# Altium PCB MCU_PCB.PcbDoc.pcbdoc
Units mil, origin at the board's own origin, x right, y up, seen from the top; angles counter-clockwise.
Board outline 2915.03 x 2275.03 mil, 4 copper layers (Top Layer 1, Middle Layer, Bottom Layer, Ground Layer), stack 23.756 mil thick; 52 components, 43 nets, 200 pads, 54 vias.
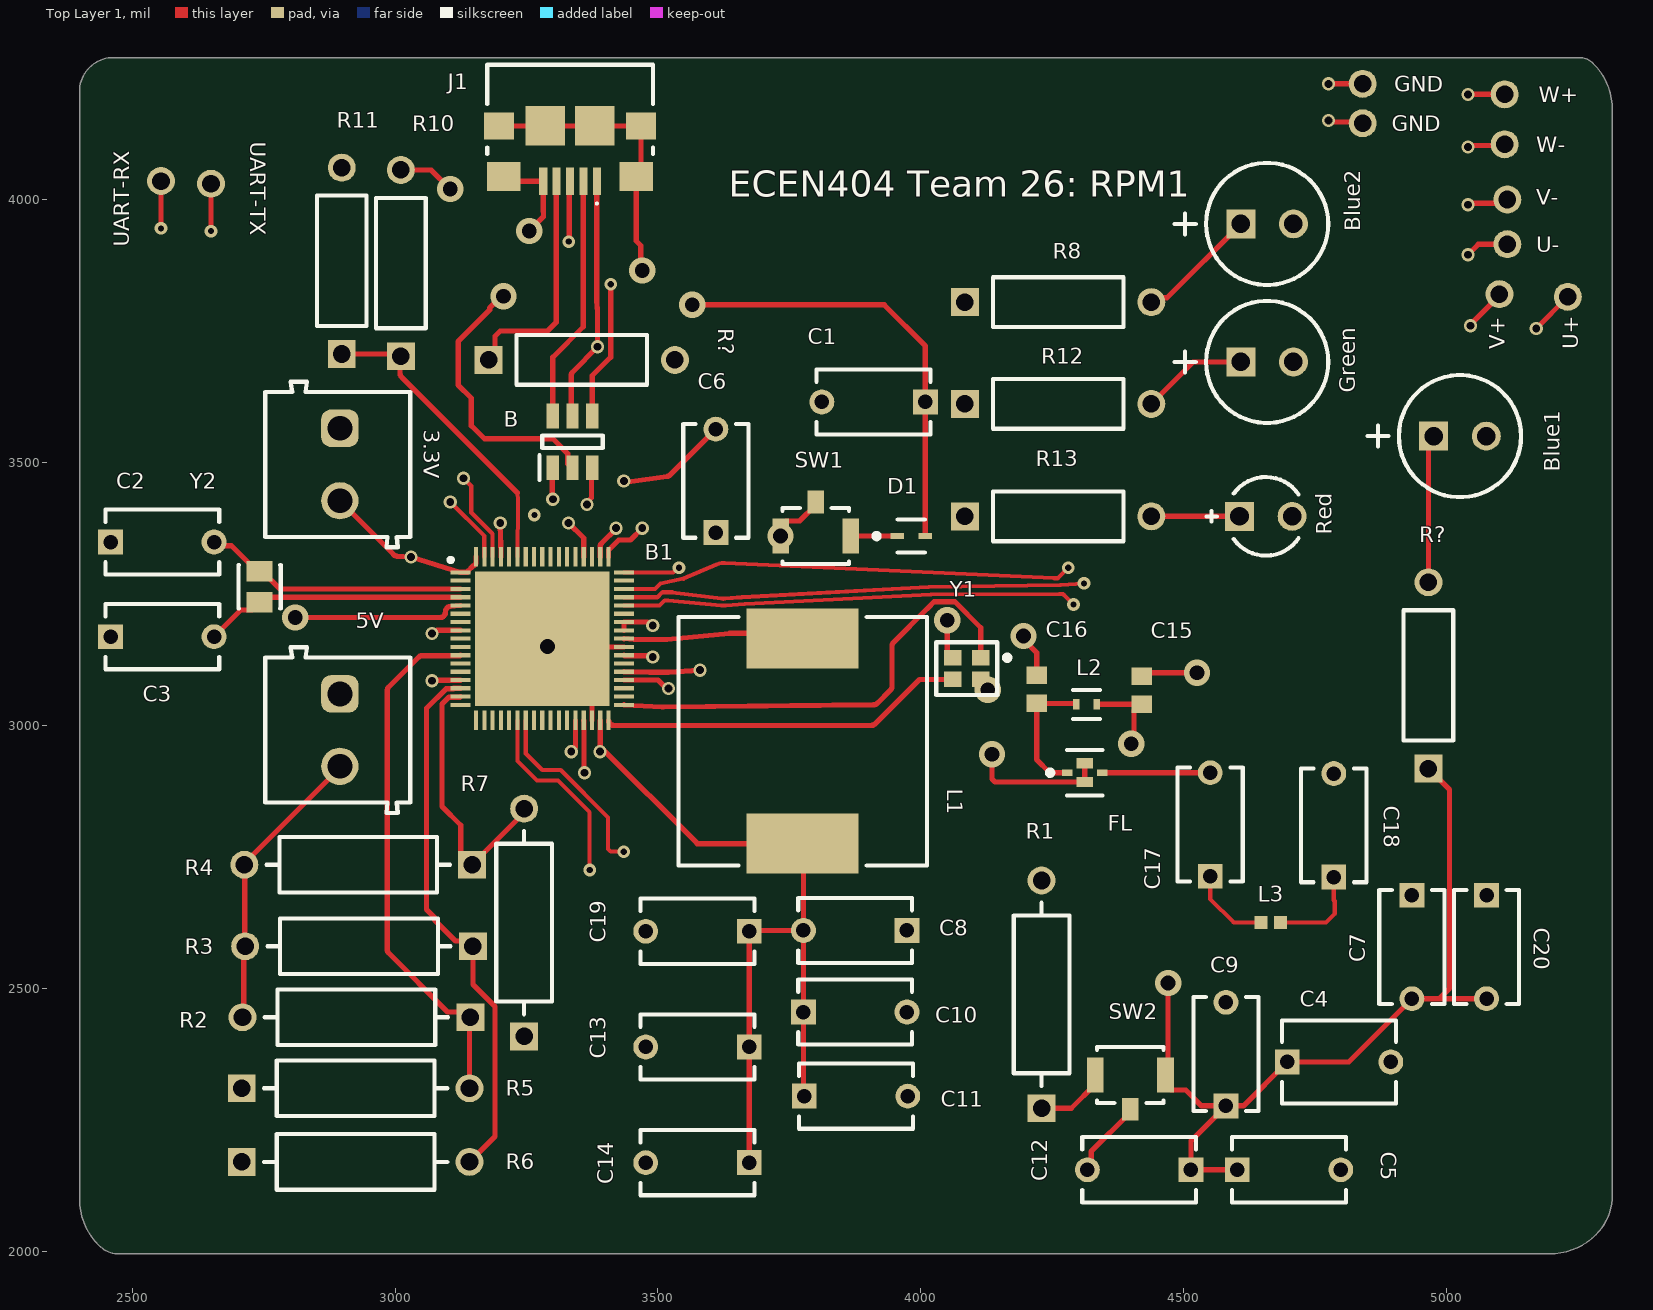
[diagram p0: Top Layer 1 view]
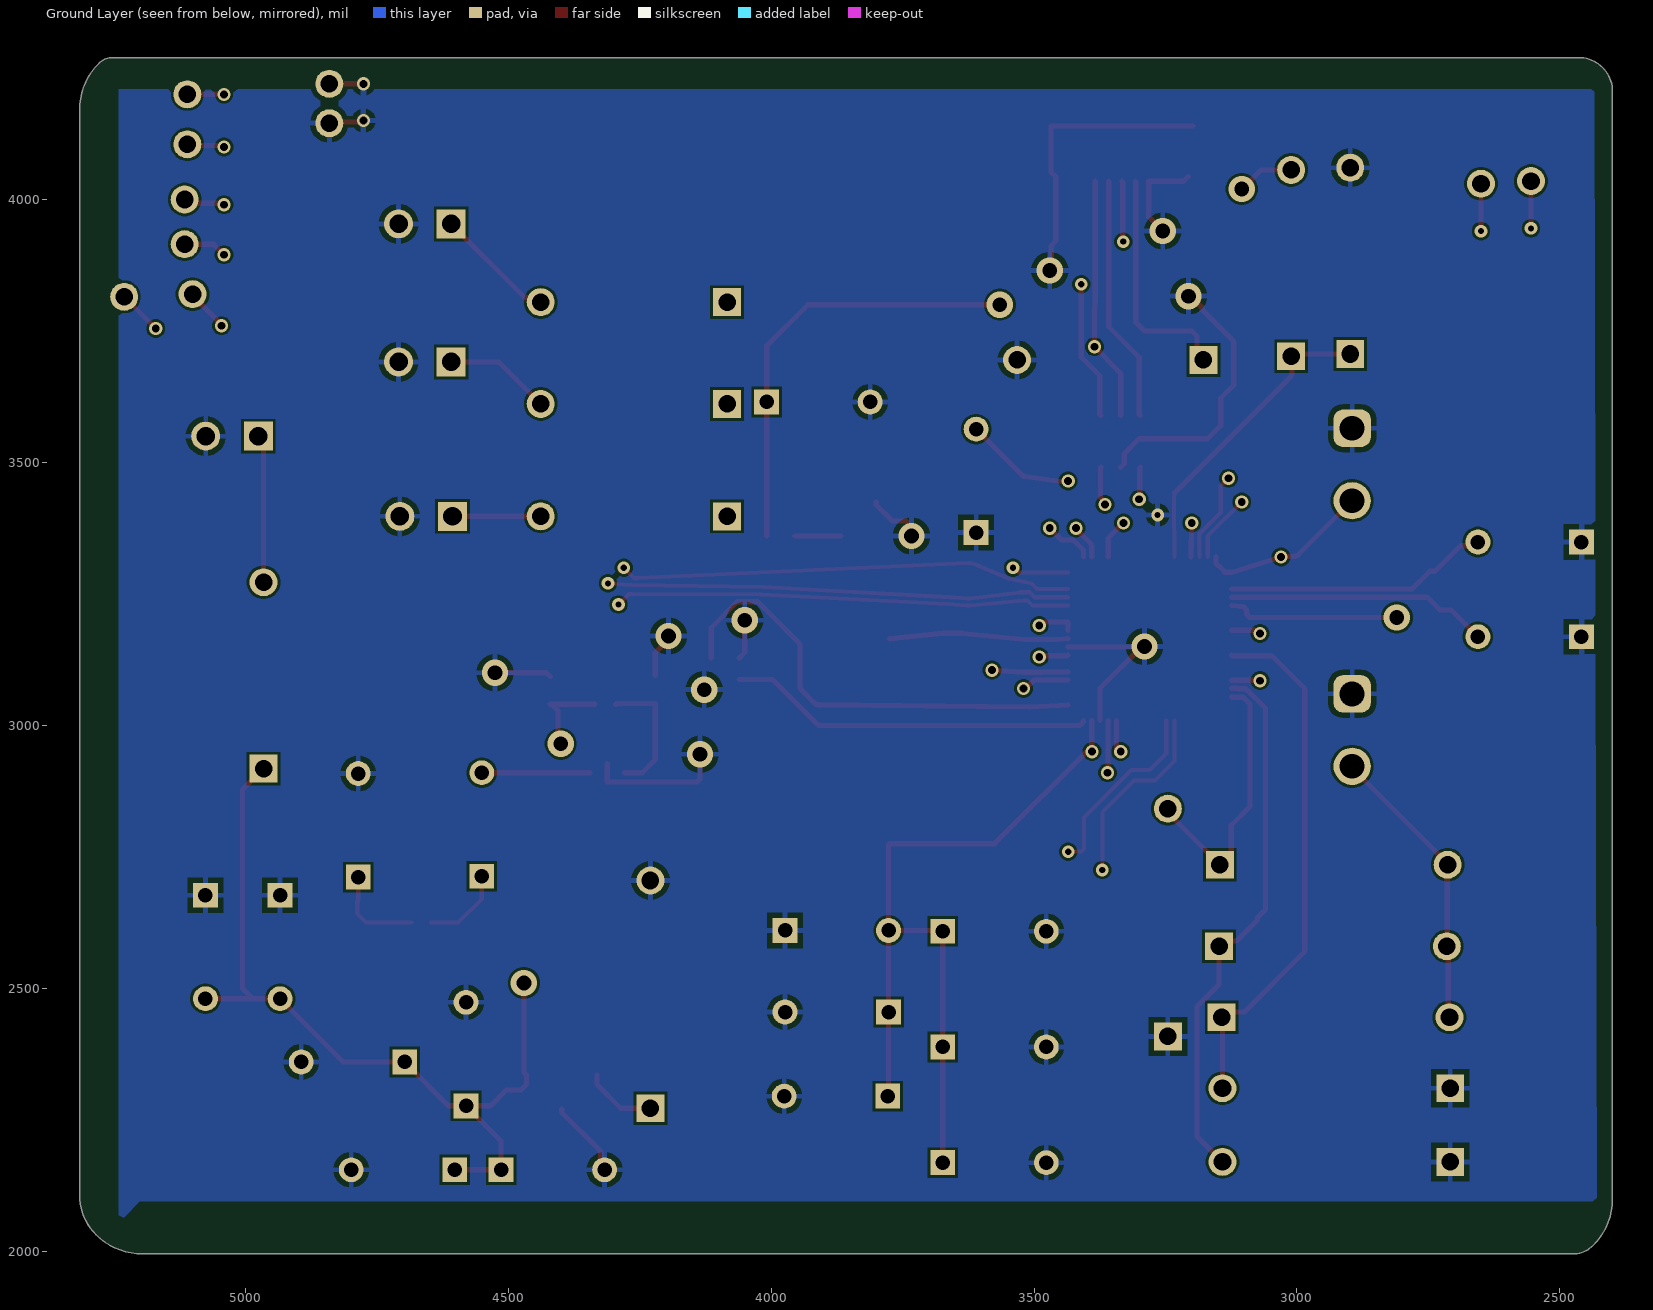
[diagram p1: Ground Layer view, seen from below]
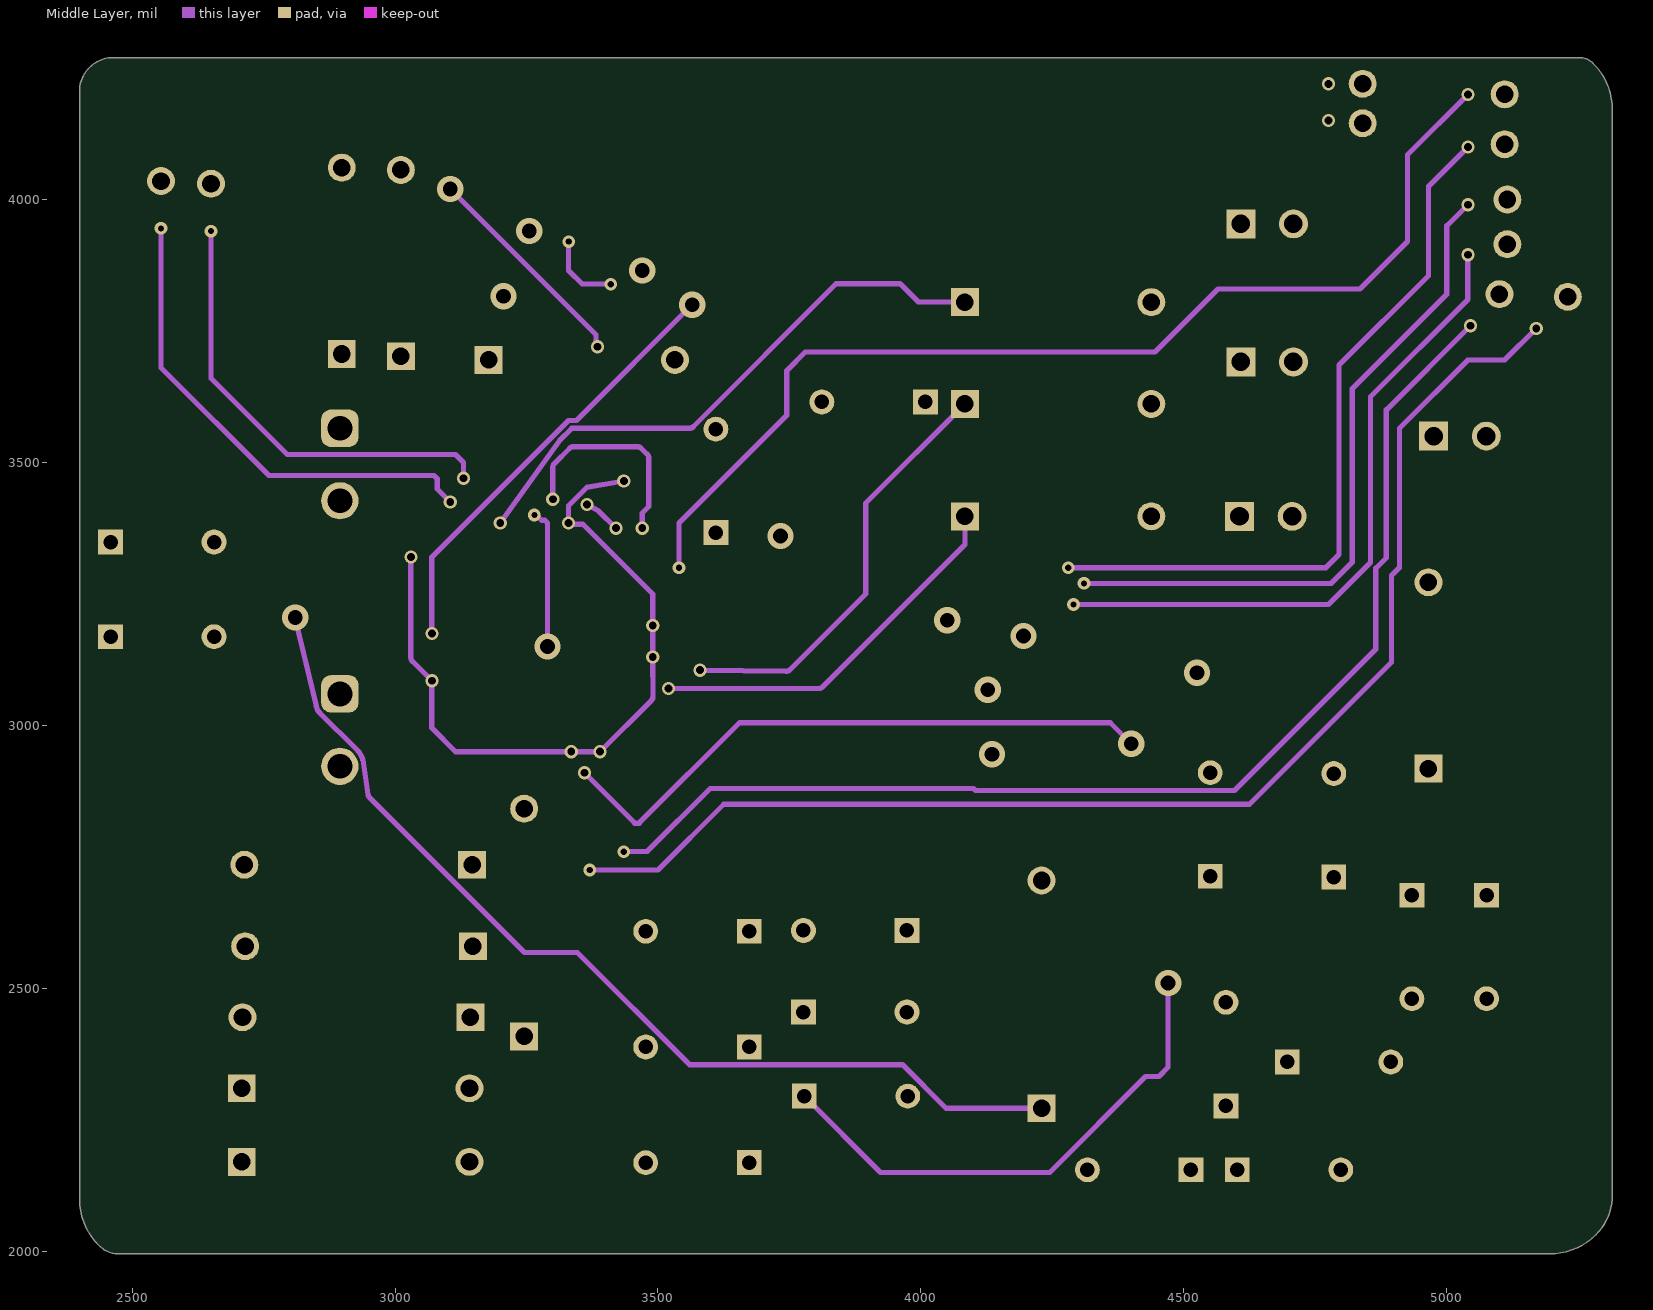
[diagram p2: Middle Layer]
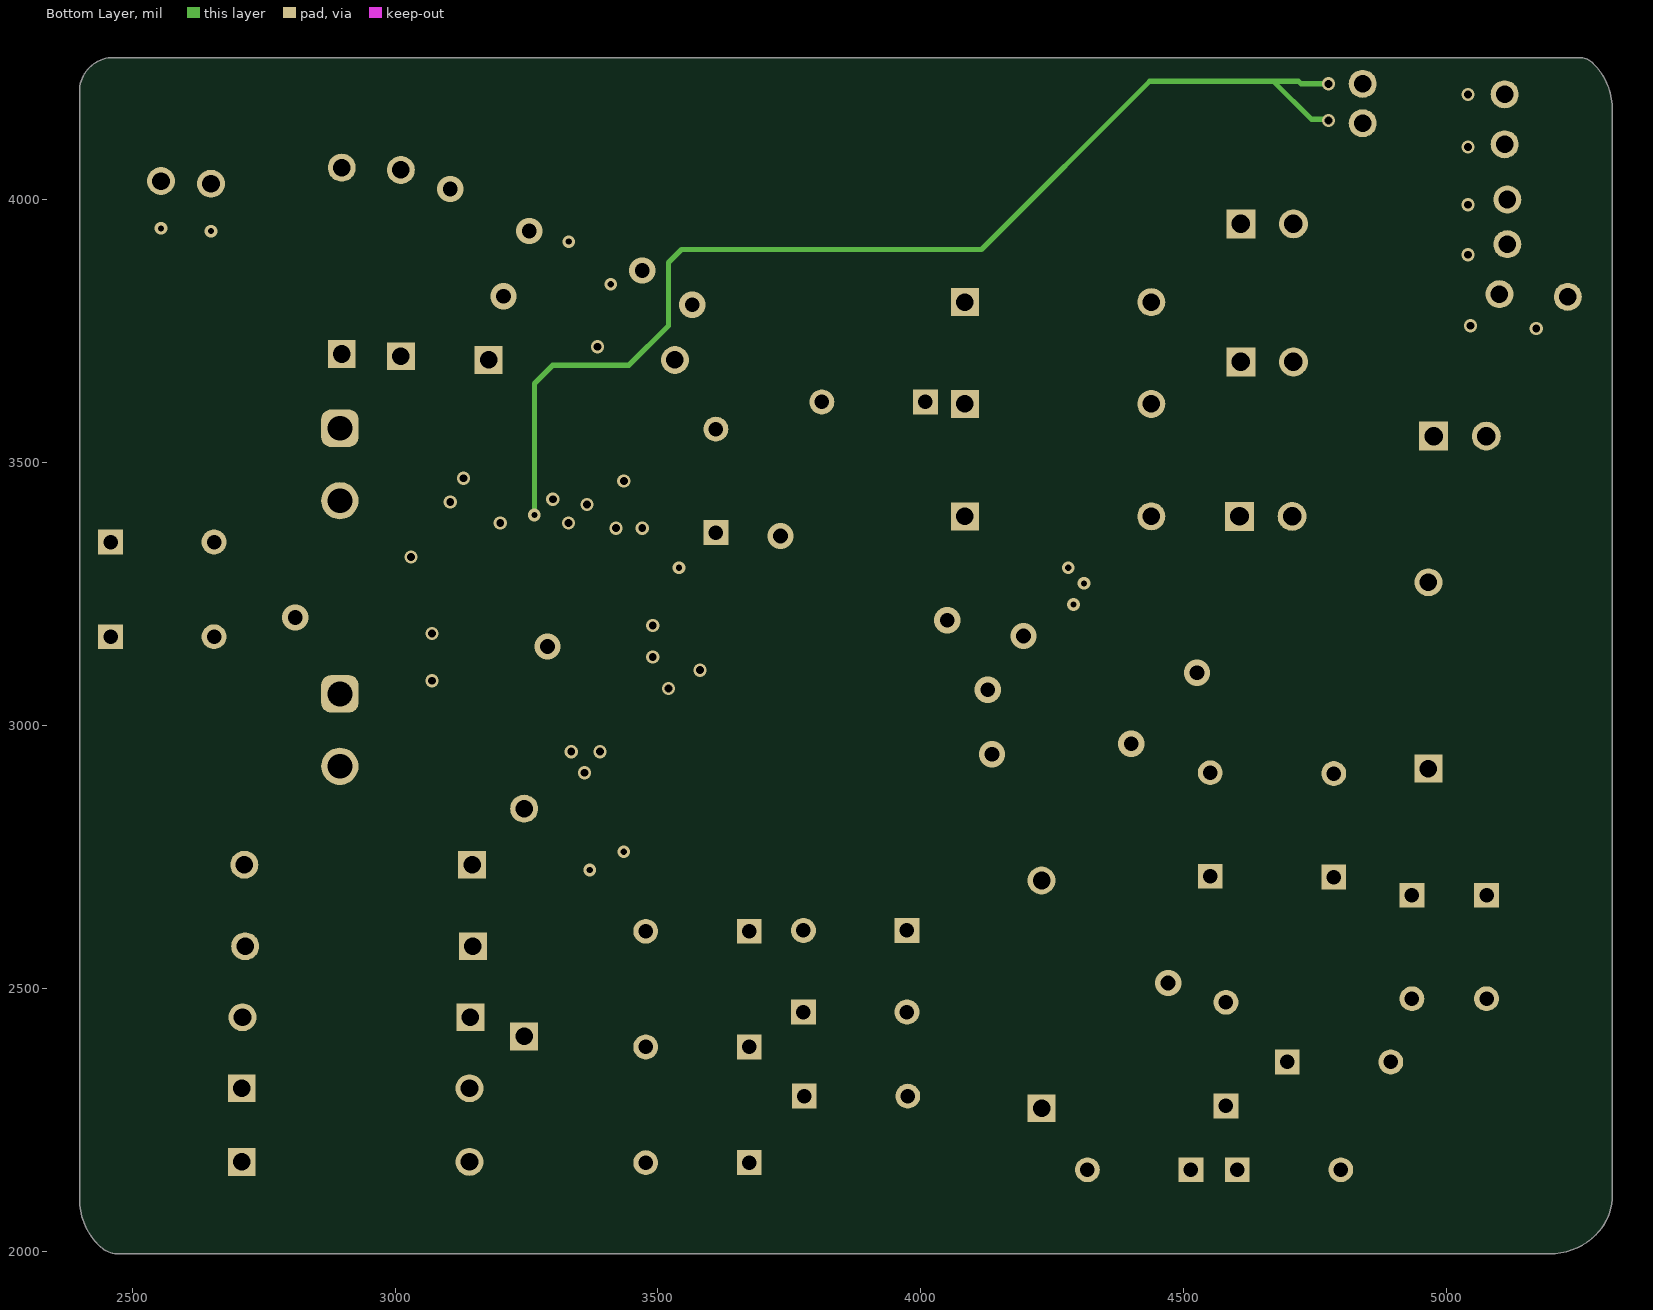
[diagram p3: Bottom Layer]
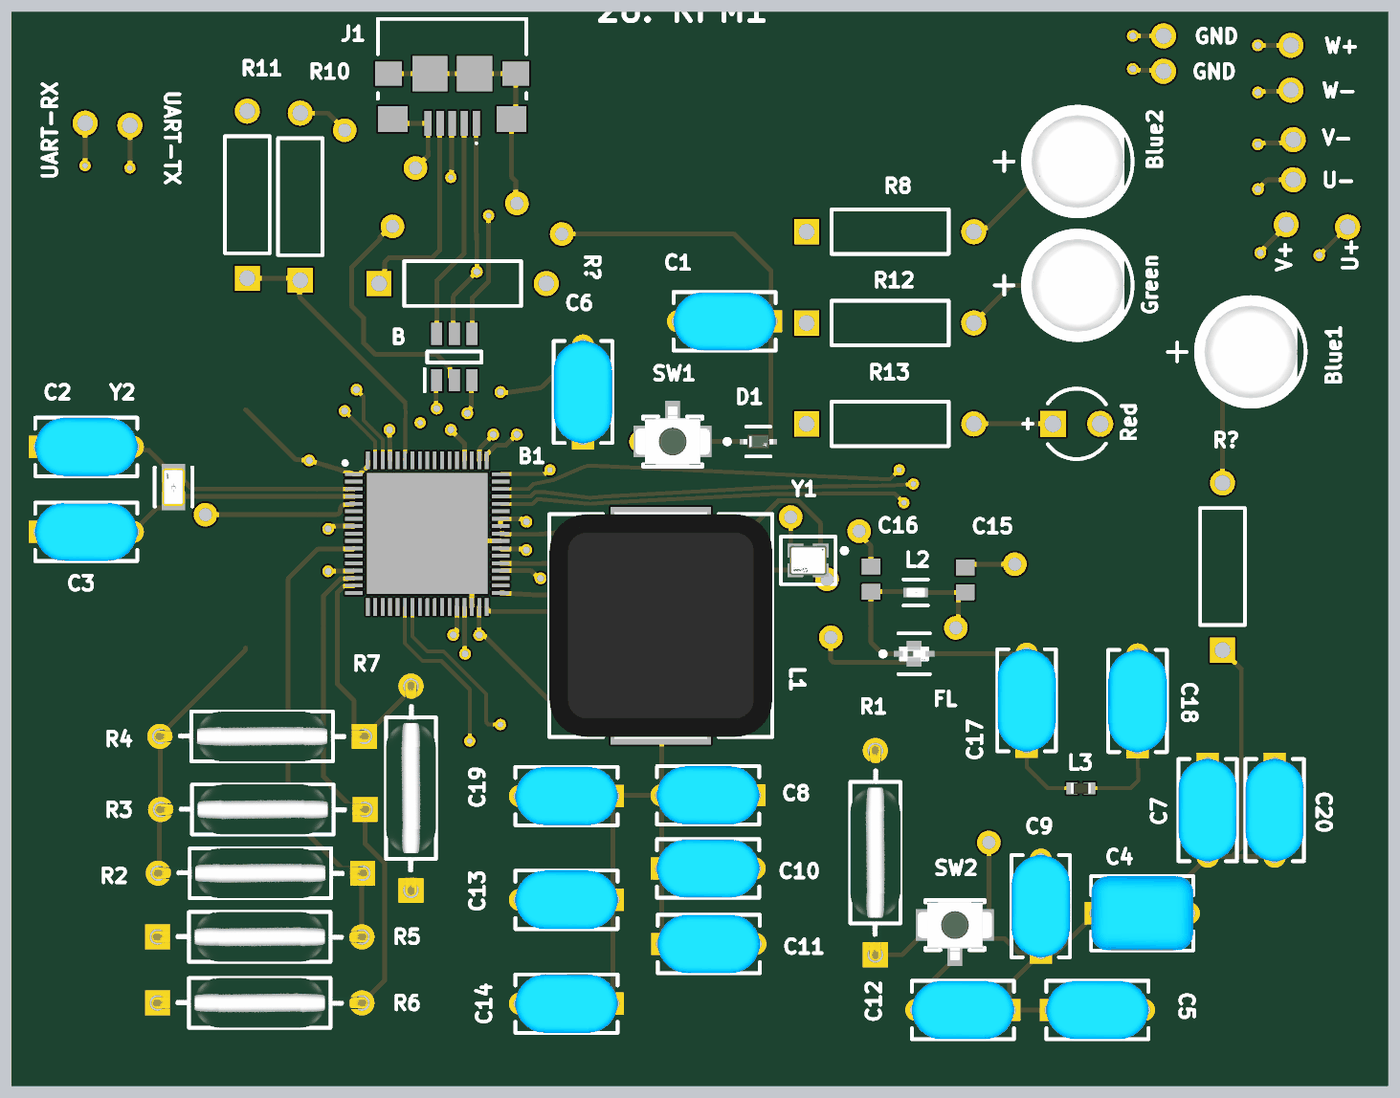
[diagram p4: 3D render of the assembled board from above, using the file's embedded part models]

## Layer stack, top to bottom
Top Solder: solder mask 0.4, Solder Resist, Dk 3.5
Top Layer 1: signal copper 1.378
Dielectric 2: prepreg 2.8, PP-006, Dk 4.1
Middle Layer: signal copper 1.4
Dielectric 1: dielectric 12.6, FR-4, Dk 4.8
Bottom Layer: signal copper 1.4
Dielectric 3: prepreg 2.8, PP-006, Dk 4.1
Ground Layer: signal copper 1.378
Bottom Solder: solder mask 0.4, Solder Resist, Dk 3.5

## Board outline
2400.6,2087.6 2399.98,4155 2399.98,4205.5 cw(c2464.14,4205.5) 2418.78,4250.87 cw(c2465,4204.65) 2465,4270.02 5251.36,4270.02 cw(c5251.36,4232.07) 5278.19,4258.9 cw(c5189.29,4170) 5315.02,4170 5315.02,2106.92 cw(c5208.79,2106.92) 5283.9,2031.81 cw(c5195,2120.71) 5195,1994.98 2475.71,1994.98 cw(c2475.71,2050) 2436.81,2011.1 cw(c2525.71,2100)

## Design rules (kind name [scope] priority, off if disabled: settings)
Clearance [All] p1: gap=5 ignorepadtopadclearanceinfootprint=FALSE
MinimumSolderMaskSliver MinimumSolderMaskSliver_4 [HasFootprint('MURA-LQP15MN3N6B02D-2_N')] p1: minsoldermaskwidth=3
MinimumSolderMaskSliver MinimumSolderMaskSliver_3 [HasFootprint('TECO-1981568-5_V')] p2: minsoldermaskwidth=1
MinimumSolderMaskSliver MinimumSolderMaskSliver_2 [HasFootprint('FP-DEA162450BT-1295A1-MFG')] p3: minsoldermaskwidth=5
MinimumSolderMaskSliver [HasFootprint('SOT95P280X145-6N')] p4: minsoldermaskwidth=5
MinimumSolderMaskSliver MinimumSolderMaskSliverB1 [HasFootprint('QFN40P800X800X100-69N-D')] p5: minsoldermaskwidth=0.5
MinimumSolderMaskSliver MinimumSolderMaskSliver_1 [All] p6: minsoldermaskwidth=10
PolygonConnect [All] p1: connectstyle=Relief reliefconductorwidth=10 reliefentries=4 polygonreliefangle="90 Angle" airgapwidth=10
RoutingVias [All] p1: holewidth=28 width=50 viastyle="Through Hole" minholewidth=28 minwidth=50 maxholewidth=28 maxwidth=50
SilkToSolderMaskClearance SilkToSolderMaskClearance_1 [HasFootprint('SOT95P280X145-6N')] p1: minsilkscreentomaskgap=5 clearancetoexposedcopper=TRUE
SilkToSolderMaskClearance [IsPad] p2: minsilkscreentomaskgap=10 clearancetoexposedcopper=TRUE
SolderMaskExpansion [All] p1: expansion=4 istentingtop=FALSE
SupplyNets "Schematic Supply Nets" [InNet('GND')] p1: voltage=0.000
Width [All] p1: maxlimit=10 minlimit=5 preferedwidth=10 midlayer1_minwidth=10 midlayer2_minwidth=10 bottomlayer_minwidth=10 minimp=50.000000 maximp=50.000000 favimp=50.000000
28 further rules are at their usual default settings.

## Components (designator, comment, footprint, x,y, rotation, side; value= is the part's Value field where it differs from the comment)
3.3V "691103110002" 691103110002 52891.06,-46503.9 r270 top
5V "691103110002" 691103110002 52891.06,-47008.9 r270 top
B "USBLC6-2SC6" SOT95P280X145-6N 3337.4,3539.21 r90 top
B1 "STM32WB55RGV6" QFN40P800X800X100-69N-D 3280,3165 r0 top
Blue1 "WP7113SGD" KING-WP7113SGD_V 5025,3550 r0 top
Blue2 "WP7113SGD" KING-WP7113SGD_V 4658.28,3953.66 r0 top
C1 "100n" FP-RDE2M1-MFG 3910,3615 r180 top
C2 "10p" FP-RDE2M1-MFG 2557.39,3348.66 r0 top
C3 "10p" FP-RDE2M1-MFG 2557.39,3168.66 r0 top
C4 "RDEC71E476MWM1H03A" FP-RDEWK1-MFG 4795,2360 r0 top
C5 "100n" FP-RDE2M1-MFG 4700,2155 r0 top
C6 "100n" FP-RDE2M1-MFG 3610,3465 r90 top
C7 "100n" FP-RDE2M1-MFG 4933.62,2578.66 r270 top
C8 "100n" FP-RDE2M1-MFG 3875,2610 r180 top
C9 "100n" FP-RDE2M1-MFG 4580,2375 r90 top
C10 "RDEC71H475K2M1H03A" FP-RDE2M1-MFG 3875,2455 r0 top
C11 "RDEC71H475K2M1H03A" FP-RDE2M1-MFG 3876.57,2295 r0 top
C12 "100n" FP-RDE2M1-MFG 4415,2155 r180 top
C13 "100p" FP-RDE2M1-MFG 3575,2388.5 r180 top
C14 "100n" FP-RDE2M1-MFG 3575,2168.5 r180 top
C15 "0.8p (0603)" CAPC1608X92X38NL15T08 4420,3066.57 r90 top
C16 "0.3p (0603)" CAPC1608X92X38NL15T08 4220,3068.43 r90 top
C17 "10n" FP-RDE2M1-MFG 4550,2811.57 r90 top
C18 "1.2p" FP-RDE2M1-MFG 4785,2810 r90 top
C19 "100n" FP-RDE2M1-MFG 3575,2608.5 r180 top
C20 "100n" FP-RDE2M1-MFG 5075.51,2578.66 r270 top
D1 "BAT54KFILM" FP-SOD-523-MFG 3981.57,3360 r0 top value=7pF
FL "DEA162450BT-1295A1" FP-DEA162450BT-1295A1-MFG 4311.54,2910 r0 top
Green "WP7113SGD" KING-WP7113SGD_V 4658.28,3691.21 r0 top
J1 "1981568-1" TECO-1981568-5_V 3332.76,4034.68 r180 top
L1 "CDRH127NP-100MC" SUMI-CDRH127_V 3775,2970 r0 top
L2 "MLK1005S2N7ST000" FP-MLK1005-IPC_C 4315,3040 r180 top
L3 "LQP15MN3N6B02D" MURA-LQP15MN3N6B02D-2_N 4665,2625 r180 top
R1 "RNC55H1002FSB14" FP-RNC55-MFG 4229.38,2488.54 r90 top value=10kΩ
R2 "RNC55H1002FSB14" FP-RNC55-MFG 2926.54,2445 r180 top value=10kΩ
R3 "RNC55H1002FSB14" FP-RNC55-MFG 2931.54,2580 r180 top value=10kΩ
R4 "RNC55H1002FSB14" FP-RNC55-MFG 2930,2735 r180 top value=10kΩ
R5 "RNC55H1002FSB14" FP-RNC55-MFG 2925,2310 r0 top value=10kΩ
R6 "RNC55H1002FSB14" FP-RNC55-MFG 2925,2170 r0 top value=10kΩ
R7 "RNC55H1002FSB14" FP-RNC55-MFG 3245.47,2625.07 r90 top value=10kΩ
R8 "MFR-25FBF52-1K" RESA60-630X240 4260.84,3804.89 r0 top
R10 "47k" RESA60-630X240 3011.05,3879.13 r90 top
R11 "MFR-25FBF52-100K" RESA60-630X240 2898.69,3883.38 r90 top
R12 "MFR-25FBF52-100K" RESA60-630X240 4260.84,3611.33 r0 top
R13 "MFR-25FBF52-100K" RESA60-630X240 4260.84,3397.53 r0 top
R? "MFR-25FBF52-1K" RESA60-630X240 4965,3095 r90 top
R? "MFR-25FBF52-100K" RESA60-630X240 3355,3695 r0 top
Red "LTL-1CHE" INDPR60-254-520X380X650 4655.84,3397.53 r0 top
SW1 "B3U-1100PM" FP-B3U-1100PM-MFG 3800,3360 r180 top
SW2 "B3U-1100PM" FP-B3U-1100PM-MFG 4398.07,2335 r0 top
Y1 "NX2016SA-32MHZ-EXS00A-CS06654" FP-NX2016SA-MFG 4087.17,3108.03 r180 top
Y2 "NX2012SA-32.768K-STD-MUB-1" FP-NX2012SA-MFG 2742.39,3263.66 r270 top

## Footprints (in the part's own frame and the unit in brackets; to place one, negate y for a bottom-side part, rotate by r counter-clockwise, add the part's x,y. Pads: shape width x height; smd on the part's side, far side on the other; paste and mask are expansions set on the pad)
691103110002 [mm] "3,50mm - modular - blue - Horizontal wire entry - Pressure clamp - 8,4mm height - 02p"
  rrect50% 1.8x1.8 hole 1.2: 1(-1271.75,-1269.9)
  round 1.8 hole 1.2: 2(-1268.25,-1269.9)
  silkscreen extent -1274,-1273.5 -1266,-1266.5, body extent -1274,-1273.5 -1266,-1266.5, height 8.45
CAPC1608X92X38NL15T08 [mm] "Chip Capacitor, 2-Leads, Body 1.60x0.80mm, IPC Medium Density"
  rect 0.85x1 smd: 1(-0.675,0) 2(0.675,0)
  body extent -0.87,-0.48 0.87,0.47, height 0.92
FP-B3U-1100PM-MFG [mm]
  rect 0.8x1.7 smd paste+0 mask+0: 1(1.7,0) 2(-1.7,0)
  rect 0.8x1.1 smd paste+0 mask+0: 3(0,-1.65)
  silkscreen extent -1.6,-1.35 1.6,1.35, body extent -2.2,-2.3 2.2,1.45, height 0.25
FP-DEA162450BT-1295A1-MFG [mm]
  rect 0.5x0.3 smd paste+0 mask+0: 1(-0.85,0) 3(0.85,0)
  rect 0.8x0.5 smd paste+0 mask+0: 2(0,-0.45) 4(0,0.45)
  silkscreen extent -1.8,-1.1 0.85,1.1, body extent -1.2,-0.8 1.2,0.8, height 0.25
FP-MLK1005-IPC_C [mm]
  rect 0.312x0.512 smd paste+0 mask+0: 1(-0.5,0) 2(0.5,0)
  silkscreen extent -0.66,-0.7 0.66,0.7, body extent -0.76,-0.4 0.76,0.4, height 0.25
FP-NX2012SA-MFG [mm]
  rect 1x1.25 smd paste+0 mask+0: 1(-0.75,0) 2(0.75,0)
  silkscreen extent -1.05,-1.02 1.05,1.02, body extent -1.35,-0.72 1.35,0.72, height 0.25
FP-NX2016SA-MFG [mm]
  rect 0.85x0.75 smd paste+0 mask+0: 1(-0.675,-0.525) 2(0.675,-0.525) 3(0.675,0.525) 4(-0.675,0.525)
  silkscreen extent -2.08,-1.28 1.48,1.28, body extent -1.2,-1 1.2,1, height 0.25
FP-RDE2M1-MFG [mm]
  rect 1.2x1.2 hole 0.7 paste-2539.97 mask+0: 1(-2.5,0)
  round 1.2 hole 0.7 paste-2539.97 mask+0: 2(2.5,0)
  silkscreen extent -2.75,-1.58 2.75,1.58, body extent -3.2,-1.68 3.2,1.68, height 0.25
FP-RDEWK1-MFG [mm]
  rect 1.2x1.2 hole 0.7 paste-2539.97 mask+0: 1(-2.5,0)
  round 1.2 hole 0.7 paste-2539.97 mask+0: 2(2.5,0)
  silkscreen extent -2.75,-2 2.75,2, body extent -3.2,-2.1 3.2,2.1, height 0.25
FP-RNC55-MFG [mm]
  rect 1.35x1.35 hole 0.85 paste-2539.97 mask+0: 1(-5.5,0)
  round 1.35 hole 0.85 paste-2539.97 mask+0: 2(5.5,0)
  silkscreen extent -4.43,-1.35 4.43,1.35, body extent -6.27,-1.45 6.27,1.45, height 0.25
FP-SOD-523-MFG [mm]
  rect 0.65x0.3 smd paste+0 mask+0: 1(-0.675,0) 2(0.675,0)
  silkscreen extent -1.8,-0.8 0.65,0.8, body extent -1.1,-0.55 1.1,0.55, height 0.25
INDPR60-254-520X380X650 [mm] "THD, 2-Leads, Dia 3.8mm, Pitch 2.54mm"
  rect 1.4x1.4 hole 0.9: 1(-1.27,0)
  round 1.4 hole 0.9: 2(1.27,0)
  silkscreen extent -2.87,-1.9 1.58,1.9, body extent -1.9,-1.9 1.9,1.9, height 6.5
KING-WP7113SGD_V [mm] "THD, 2-Leads, Dia 5.9mm, Body Length 8.6mm"
  rect 1.4x1.4 hole 0.889: 1(-1.27,0)
  round 1.4 hole 0.889: 2(1.27,0)
  silkscreen extent -4.47,-2.95 2.95,2.95, body extent -2.95,-2.95 2.5,2.95, height 15.5
MURA-LQP15MN3N6B02D-2_N [mm] "Chip Inductor, 2-Leads, Body 1.10x0.60mm, IPC Medium Density"
  rect 0.63x0.64 smd: 1(-0.465,0) 2(0.465,0)
  body extent -0.55,-0.3 0.55,0.3, height 0.45
QFN40P800X800X100-69N-D [mm]
  rect 0.95x0.2 smd: 1(-3.95,3.2) 2(-3.95,2.8) 3(-3.95,2.4) 4(-3.95,2) 5(-3.95,1.6) 6(-3.95,1.2) 7(-3.95,0.8) 8(-3.95,0.4) 9(-3.95,0) 10(-3.95,-0.4) 11(-3.95,-0.8) 12(-3.95,-1.2) 13(-3.95,-1.6) 14(-3.95,-2) 15(-3.95,-2.4) 16(-3.95,-2.8) 17(-3.95,-3.2) 35(3.95,-3.2) 36(3.95,-2.8) 37(3.95,-2.4) 38(3.95,-2) 39(3.95,-1.6) 40(3.95,-1.2) 41(3.95,-0.8) 42(3.95,-0.4) 43(3.95,0) 44(3.95,0.4) 45(3.95,0.8) 46(3.95,1.2) 47(3.95,1.6) 48(3.95,2) 49(3.95,2.4) 50(3.95,2.8) 51(3.95,3.2)
  rect 0.2x0.95 smd: 18(-3.2,-3.95) 19(-2.8,-3.95) 20(-2.4,-3.95) 21(-2,-3.95) 22(-1.6,-3.95) 23(-1.2,-3.95) 24(-0.8,-3.95) 25(-0.4,-3.95) 26(0,-3.95) 27(0.4,-3.95) 28(0.8,-3.95) 29(1.2,-3.95) 30(1.6,-3.95) 31(2,-3.95) 32(2.4,-3.95) 33(2.8,-3.95) 34(3.2,-3.95) 52(3.2,3.95) 53(2.8,3.95) 54(2.4,3.95) 55(2,3.95) 56(1.6,3.95) 57(1.2,3.95) 58(0.8,3.95) 59(0.4,3.95) 60(0,3.95) 61(-0.4,3.95) 62(-0.8,3.95) 63(-1.2,3.95) 64(-1.6,3.95) 65(-2,3.95) 66(-2.4,3.95) 67(-2.8,3.95) 68(-3.2,3.95)
  rect 6.5x6.5 smd: 69(0,0)
  silkscreen extent -4.52,3.7 -4.33,3.9
RESA60-630X240 [mm] "Axial Resistor, 2-Leads, Dia 2.4mm, Body Length 6.3mm"
  rect 1.35x1.35 hole 0.85: 1(-4.5,0)
  round 1.35 hole 0.85: 2(4.5,0)
  silkscreen extent -3.15,-1.2 3.15,1.2, body extent -3.15,-1.2 3.15,1.2, height 2.4
SOT95P280X145-6N [mm]
  rect 1.2x0.6 smd: 1(-1.25,0.95) 2(-1.25,0) 3(-1.25,-0.95) 4(1.25,-0.95) 5(1.25,0) 6(1.25,0.95)
  silkscreen extent -1.85,-1.46 0.3,1.6
SUMI-CDRH127_V [mm] "SMD, 2-Leads, Body 12x12mm"
  rect 5.4x2.9 smd: 1(0,4.95) 2(0,-4.95)
  silkscreen extent -6,-6 6,6, body extent -6,-6.1 6,6.1, height 8.4
TECO-1981568-5_V [mm] "SMD, 5-Leads, Body 8x5.9mm, Pitch 0.65mm"
  rect 0.4x1.35 smd: 1(-1.3,0) 2(-0.65,0) 3(0,0) 4(0.65,0) 5(1.3,0)
  rect 1.6x1.4 smd: 6(-3.2,-0.225) 7(3.2,-0.225)
  rect 1.45x1.3 smd: 8(-3.425,-2.675) 9(3.425,-2.675)
  rect 1.9x1.9 smd: 10(-1.2,-2.675) 11(1.2,-2.675)
  silkscreen extent -4,-5.63 4,1.12, body extent -4,-5.63 4,0.28, height 3

## Part data
3.3V 5V: library part CMP-1502-03254-2, Color=Blue, Current=10A, Max Operating Temperature=105°C, Min Operating Temperature=-40°C, Voltage=125V, Contact Material="Brass, Copper, Nickel, Tin, Zinc", Contact Plating=Tin, Current Rating=10A, Height=8.5mm, Housing Material=Nylon, Lead Pitch=3.5mm, Length=7mm, Mount="Through Hole", NexarPartId=18818286, Number Of Contacts=2, Number of Levels=1, Number of Pins=2, Number of Positions Per Level=2, Number Of Rows=1, Packaging=Box, Pitch=3.5052mm, Plating=Steel, REACH SVHC=Unknown, RoHS=Compliant, Stripping Length=-6mm, Termination=Screw, Voltage Rating=125V, Width=8mm, Wire Gauge (Max)=26AWG, Wire Gauge (Min)=16AWG, Wire/Cable Gauge=26AWG
B: "TVS Diode Array Uni-Directional USBLC6-2SC6 17V, SOT-23 6-Pin", Manufacturer_Name=STMicroelectronics, Mouser Part Number=511-USBLC6-2SC6, Arrow Part Number=USBLC6-2SC6, Arrow Price/Stock=https://www.arrow.com/en/products/usblc6-2sc6/stmicroelectronics?utm_currency=USD&region=europe, Datasheet Link=https://www.st.com/resource/en/datasheet/usblc6-2.pdf, Geometry.Height=1.45mm, Manufacturer_Part_Number=USBLC6-2SC6, Mouser Price/Stock=https://www.mouser.co.uk/ProductDetail/STMicroelectronics/USBLC6-2SC6?qs=po45yt2pPpu%2FhNIlwQdTlg%3D%3D
B1: "ARM Microcontrollers - MCU Ultra-low-power dual core Arm Cortex-M4 MCU 64 MHz, Cortex-M0 32MHz with 1 Mbyte Flash, BLE, 802.15.4, USB, LCD, AES-256", Manufacturer_Name=STMicroelectronics, Mouser Part Number=511-STM32WB55RGV6, Arrow Part Number=STM32WB55RGV6, Arrow Price/Stock=https://www.arrow.com/en/products/stm32wb55rgv6/stmicroelectronics?utm_currency=USD&region=nac, Datasheet Link=https://www.st.com/resource/en/datasheet/stm32wb55cc.pdf, Geometry.Height=1mm, Manufacturer_Part_Number=STM32WB55RGV6, Mouser Price/Stock=https://www.mouser.co.uk/ProductDetail/STMicroelectronics/STM32WB55RGV6?qs=lYGu3FyN48cg9Kq%252BQIugSQ%3D%3D
Blue1 Blue2 Green: library part CMP-2100-03698-1, "LED Green, 62.5 mW, 25 mA, -40 to 85 degC, 2-Pin THD, RoHS, Bulk", Case/Package=Radial, Colour=Green, Forward Voltage=2.2V, Manufacturer=Kingbright, Package Description="2-Pin Through Hole Device, Dia 5.9 mm, Body Length 8.6 mm", Package Quantity=1000, Test Current=20mA, Datasheet URL=http://www.kingbrightusa.com/images/catalog/SPEC/WP7113SGD.pdf, Datasheet Version="Rev. 6B, 01/2015", Dominant Wavelength=568nm, Height=8.6mm, Illumination Colour=Green, Lead Free=LeadFree, Lens Style=Tinted, Luminous Intensity=40mcd, Package Reference=WP7113SGD, Packaging=Bulk, RoHSCompliant=true, Viewing Angle=30degrees, Wavelength=568nm
C1 C2 C3 C5 C6 C7 C8 C9 C10 C11 C12 C13 C14 C17 C18 C19 C20: library part CMP-06035-049833-1, "Ceramic Capacitor 4.7uF ±10% 50V X7S Radial", Capacitance=4.7uF, Case/Package=Radial, Dielectric=X7S, Max Operating Temperature=125°C, Min Operating Temperature=-55°C, Package Quantity=1500, Resistor Type=Ceramic, Tolerance=10%, Voltage Rating=50V, Height=4mm, Height - Seated (Max)=0.236inch, Lead Diameter=0.5mm, Lead Pitch=0.197inch, Lead/Base Style=Kinked, Length=0.217inch, Mount="Through Hole", Packaging="Tape and Reel", Termination=Radial, Voltage Rating (DC)=50V, Width=0.124inch
C4: library part CMP-06035-054222-1, "Ceramic Capacitor 47uF ±20% 25V X7S Radial", Capacitance=47uF, Case/Package=Radial, Dielectric=X7S, Max Operating Temperature=125°C, Min Operating Temperature=-55°C, Package Quantity=1500, Resistor Type=Ceramic, Tolerance=20%, Voltage Rating=25V, Height=7.5mm, Height - Seated (Max)=0.394inch, Lead Diameter=0.5mm, Lead Pitch=0.197inch, Lead/Base Style=Kinked, Length=0.217inch, Mount="Through Hole", Packaging="Tape and Reel", Termination=Radial, Voltage Rating (DC)=25V, Width=7.5mm
C15 C16: library part CMP-2006-01132-1, Manufacturer=Vitramon, Part Number=VJ0603Y473KXAAC
D1: library part CMP-12187-000026-1, "DIODE SCHOTTKY 40V 300MA SOD523", Capacitance=7pF, Forward Current=300mA, Manufacturer=STMicroelectronics, Max Junction Temp=+150°C, Max Repetitive Reverse Voltage=40V, Max Surge Forward Current=1.25A, Package=SOD-523, Peak Reverse Current=1uA, Temperature="-40°C to +150°C", Temperature Range Low=-40°C, Automotive=No, Category=Diode, ComponentLink2Description=Datasheet, ComponentLink2URL=https://www.st.com/content/ccc/resource/technical/document/datasheet/07/50/54/f2/0d/ba/4a/79/CD00001322.pdf/files/CD00001322.pdf/jcr:content/translations/en.CD00001322.pdf, Device Class L1="Discrete Semiconductors", Device Class L2=Diodes, Device Class L3="Schottky Diodes", Digikey Description="DIODE SCHOTTKY 40V 300MA SOD523", Height=0.7mm, Lead Free=Yes, Manufacturer Part Number=BAT54KFILM, Mouser Description="Schottky Diodes & Rectifiers schottky diode", Octopart=https://octopart.com/bat54kfilm-stmicroelectronics-39618022, RoHS=TRUE, Temperature Range High=+150°C
FL: library part CMP-08258-000001-1, "RF FILTER BAND PASS 2.45GHZ 0603", Case Code (Imperial)=0603, Case Code (Metric)=1608, Frequency=2.45GHz, Bandwidth=100MHz, Insertion Loss=1.8dB, Mount="Surface Mount", Packaging="Tape and Reel", RoHS Compliant=Yes
J1: library part CMP-2000-05408-1, "Micro USB Receptacle Standard Type B Assy, 5-Pin SMD, RoHS, Tape and Reel", Current Rating (Max)=1/ContactA, Manufacturer="TE Connectivity", Operating Temp Range=-55Cto85C, Operating Temperature Max Deg. C=85C, Operating Temperature Min Deg. C=-55C, Voltage Rating Max=30VAC, Body Orientation=RightAngle, Contact Material=CopperAlloy, Contact Plating=GoldOverNickel, Datasheet URL=http://www.mouser.com/ds/2/418/NG_CD_1981568_E2-621296.pdf, Datasheet Version="Rev. E2, 08/2015", Gender=RCP, Housing Material=Thermoplastic, Manufacturer URL=http://www.te.com/, Mounting Style=SurfaceMount, Number Of Contacts=5POS, Number of Ports=1Port, Number of Terminals=5, Packaging=TapeandReel, Pitch (mm)=0.65mm, Product Depth (mm)=5.6mm, Product Height (mm)=3mm, Product Length (mm)=8mm, Termination Method=Solder, TYPE=MicroUSB
L1: library part CMP-2000-06084-1, "Power Inductor, 10 uH, +/- 20%, -40 to 100 degC, 2-Pin SMD, RoHS, Tape and Reel", Current - Saturation=-, Current Rating=5.4A, DC Resistance (DCR)=21.6mOhmMax, Frequency - Test=1kHz, Inductance=10µH, Manufacturer=Sumida, Operating Temperature=-40°C~100°C, Package / Case=Nonstandard, Package Description="2-Pin Surface Mount Device, Body 12 x 12 mm", Package Reference=CDRH127, Standard Package=1, Tolerance=±20%, Catalog Drawings=CDRH127SeriesFrontCDRH127SeriesSideCDRH127SeriesBottom, Category=Inductors,Coils,Chokes, Datasheet URL=http://products.sumida.com/products/pdf/CDRH127.pdf, Datasheet Version=01/2014, Family=FixedInductors, Frequency - Self Resonant=-, Height - Seated (Max)="0.315\"(8.00mm)", Manufacturer URL=http://www.sumida.com/, Material - Core=-, Mounting Technology=SurfaceMount, Mounting Type=SurfaceMount, Online Catalog=CDRHSeries, Other Names=308-1457-1, Packaging=CutTape(CT), Product Training Modules=PowerInductorBasics, Q @ Freq=-, Ratings=-, Series=CDRH127, Shielding=Shielded, Size / Dimension="0.472\"Lx0.472\"W(12.00mmx12.00mm)", TYPE=-
L2: library part CMP-08253-000188-1, "Unshielded Multilayer Inductor 2.7nH ±0.3nH 500mA 0.2Ω SMD 0402", Case Code (Imperial)=0402, Case Code (Metric)=1005, Current Rating=500mA, DC Resistance (DCR)=200mR, Inductance=2.7nH, Max Operating Temperature=125°C, Min Operating Temperature=-55°C, Package Quantity=1, Self Resonant Frequency=7.5GHz, Test Frequency=100MHz, Case/Package=0402, Core Material=Ceramic, Depth=0.6mm, Height=0.6mm, Height - Seated (Max)=0.024inch, Length=0.039inch, Max DC Current=500mA, Mount="Surface Mount", Packaging="Tape and Reel", Radiation Hardening=No, RoHS Compliant=Yes, Series=MLK, Shielding=Unshielded, Width=0.02inch
L3: library part CMP-1662-00027-1, "Inductor, 500 MHz, 170 mA, 0.5 Ohm, -40 to 85 degC, 01005 (0402 Metric), RoHS, Tape and Reel", Case Code (Imperial)=0603, Case Code (Metric)=1608, Colour=White, Forward Current="5 mA", Forward Voltage="3.15 V", Max Operating Temperature="80 degC", Min Operating Temperature="-20 degC", Package Quantity=1, Power Rating="70 mW", Case\Package=0603, ComponentLink1Description="Manufacturer URL", ComponentLink1URL=http://www.murata.com/, ComponentLink2Description=Datasheet, ComponentLink2URL=http://download.siliconexpert.com/pdfs/2016/4/21/8/25/31/646/mrt_/manual/797549851250188lqp15mn3n6b0223.pdf, DatasheetVersion=Apr-16, Height="0.55 mm", Illumination Colour=White, Length="1.6 mm", Lens Style=Diffused, Luminous Intensity="28 mcd", Mount="Surface Mount", Nominal Vf="2.93 V", PackageDescription="2-Pin Surface Mount Device, Body 1 x 0.5 mm", PackageReference=0402, Packaging="Tape and Reel", Pins=2, Radiation Hardening=No, RoHSCompliant=true, Viewing Angle="130 degrees", Width="0.8 mm"
R1 R2 R3 R4 R5 R6 R7: library part CMP-02408-000004-1, "RES 10K OHM 1/8W 1% AXIAL", Manufacturer=Vishay, Package=RNC55, Power Rating=0.125W, Resistance=10kΩ, Temperature="-65°C to +175°C", Temperature Coefficient=50ppm/°C, Temperature Range High=+175°C, Temperature Range Low=-65°C, Tolerance=1%, Voltage Rating=200V, Automotive=No, Category=Res, ComponentLink2Description=Datasheet, ComponentLink2URL=https://www.vishay.com/docs/31025/erc.pdf, Composition="Metal Film", Device Class L1="Passive Components", Device Class L2=Resistors, Device Class L3="Through-Hole Resistors", Digikey Description="RES 10K OHM 1/8W 1% AXIAL", Failure Rate=0.001%, Height=2.69mm, Ipc Land Pattern Name=RESAD1100W85L762D269, Lead Free=No, Manufacturer Part Number=RNC55H1002FSB14, Military Standard=true, Octopart=https://octopart.com/rnc55h1002fs-vishay-40848808, RoHS=FALSE, Series=RNC
R8 R?: library part CMP-1659-00075-1, "Axial Resistor, 1 KOhm, +/- 1%, 250 mW, -55 to 155 degC, 2-Pin THD, RoHS, Bulk", Case\Package=Axial, Max Operating Temperature="155 degC", Min Operating Temperature="-55 degC", Package Quantity=200, Power Rating="250 mW", Resistance="10 kohm", Tolerance=1%, Voltage Rating="250 V", ComponentLink1Description="Manufacturer URL", ComponentLink1URL=http://www.yageo.com/, ComponentLink2Description=Datasheet, ComponentLink2URL=http://www.yageo.com/documents/recent/Yageo%20LR_MFR_2013.pdf, DatasheetVersion=Apr-13, Length="0.248 inch", PackageDescription="2-Pin Axial Lead, Dia 2.4 mm, Body Length 6.3 mm", PackageReference=MFR-25, Packaging=Bulk, RoHSCompliant=true
R10 R11 R12 R13 R?: library part CMP-1659-00073-1, "Axial Resistor, 100 KOhm, +/- 1%, 0.25 W, -55 to 155 degC, 2-Pin THD, RoHS, Bulk", Case\Package=Axial, Max Operating Temperature="155 degC", Min Operating Temperature="-55 degC", Package Quantity=200, Power Rating="250 mW", Resistance="475 Ohm", Tolerance=1%, Voltage Rating="250 V", ComponentLink1Description="Manufacturer URL", ComponentLink1URL=http://www.yageo.com/, ComponentLink2Description=Datasheet, ComponentLink2URL=http://www.yageo.com/documents/recent/Yageo%20LR_MFR_2013.pdf, DatasheetVersion=Apr-13, Length="0.248 inch", Mount="Through Hole", PackageDescription="2-Pin Axial Lead, Dia 2.4 mm, Body Length 6.3 mm", PackageReference=MFR-25, Packaging=Bulk, RoHSCompliant=true
Red: library part CMP-1674-00005-1, "Radial LED, 12.6 mcd, 20 mA, 2 V, -55 to 100 degC, 2-Pin THD, RoHS, Bulk", Case\Package=Radial, Current Rating="3.6 A", Max Operating Temperature="130 degC", Min Operating Temperature="-40 degC", Package Quantity=55, Resistance="0.045 Ohm", Tolerance=20%, ComponentLink1Description="Manufacturer URL", ComponentLink1URL=http://www.us.liteon.com/, ComponentLink2Description=Datasheet, ComponentLink2URL=https://datasheet.ciiva.com/15117/getdatasheetpartid-187746-15117985.pdf, DatasheetVersion=Dec-03, Height="1.1 inch", Lead Pitch="11.44 mm", Length="0.97 inch", Mount="Through Hole", PackageDescription="2-Pin Through Hole Device, Dia 3.8 mm, Pitch 2.54 mm", PackageReference=LTL-1CHE, Packaging=Tray, Radiation Hardening=No, RoHSCompliant=true, Shielding=Unshielded, Width="0.62 inch"
SW1 SW2: library part CMP-08834-000028-1, "SWITCH TACTILE SPST-NO 0.05A 12V", Case/Package=SMD/SMT, Contact Resistance=100mR, Current Rating=50mA, Max Operating Temperature=70°C, Max Voltage Rating (DC)=12V, Min Operating Temperature=-25°C, Operating Force=1.5N, Package Quantity=1000, Ratings="Dust Proof", Actuator Length=0.4mm, Actuator Type=Standard, Connector Type=SMD/SMT, Electrical Life=200000Cycles, Illumination Type=Non-Illuminated, Mechanical Life=200000Cycles, Mount="Surface Mount", Orientation=Straight, Packaging="Tape and Reel", REACH SVHC="No SVHC", RoHS Compliant=Yes, Series=B3U, Switch Function=Off-Mom, Switch Travel=0.15mm, Termination=SMD/SMT, Throw Configuration=SPST, Voltage Rating (DC)=12V, Weight=0.022g
Y1: library part CMP-200220-000017-1, "CRYSTAL 32.0000MHZ 8PF SMD", Case/Package=SMD/SMT, ESR (Equivalent Series Resistance)=60R, Frequency=32MHz, Load Capacitance=8pF, Max Operating Temperature=125°C, Min Operating Temperature=-40°C, Ratings=AEC-Q200, Mount="Surface Mount", Packaging="Tape and Reel"
Y2: library part CMP-200220-000019-1, "CRYSTAL 32.7680KHZ 12.5PF SMD", Case/Package=SMD/SMT, ESR (Equivalent Series Resistance)=80kR, Frequency=32.768kHz, Frequency Tolerance=20ppm, Load Capacitance=12.5pF, Max Operating Temperature=85°C, Min Operating Temperature=-40°C, Height=0.024inch, Length=0.081inch, Mount="Surface Mount", Packaging="Cut Tape", RoHS Compliant=Yes, Series=NX2012SA, Width=0.047inch

## Free pads (board coordinates)
  round 53.15 hole 33.46: 2(2650,4030) 3(2555,4035) 4(4840,4220) 5(4840,4145) 6(5110,4200) 7(5110,4105) 8(5115,4000) 9(5115,3915) 10(5100,3820) 11(5230,3815)

## Via types
v1: diameter 25, hole 15, Top Layer 1 to Ground Layer, 28 vias
v2: diameter 50, hole 28, Top Layer 1 to Ground Layer, 15 vias
v3: diameter 24, hole 12, Top Layer 1 to Ground Layer, 11 vias

## Nets (pads, with @x,y where several pads share a name; then routed paths per layer and width w, separated by ;. In a path a pad name is that pad's centre, name@x,y a point inside that pad or via, vN(x,y) a via of type N, cw(c..) or ccw(c..) an arc to the next point about the centre after c; other vN are vias at no path point)
GND: 3.3V.1 5V.1 B1.32 B1.42 B1.69 B.2 Blue1.2 Blue2.2 C1.2 C2.1 C3.1 C4.2 C5.2 C6.1 C7.1 C8.1 C9.2 C10.2 C11.2 C12.2 C13.2 C14.2 C15.2 C16.2 C18.2 C19.2 C20.1 FL.2 FL.4 Green.2 J1.5 J1.6 J1.7 J1.8 J1.9 J1.10 J1.11 pad.4 pad.5 R1.2 R5.1 R6.1 R7.1 R11.2 R?.2@3532.17,3695 Red.2 SW1.1 SW1.3 SW2.3 Y1.2 Y1.4 | length 4976.5
  Top Layer 1 w10: J1.9 J1.11 J1.10 J1.8 3467.6,4052.4 J1.6 3458.74,3921.18 3467.18,3912.74 3467.18,3867.82 v2(3470,3865) ; v2(3206.35,3816.28) 3202.41,3816.28 3179.86,3793.72 3179.86,3789.79 3120,3729.93 3120,3647.5 3145,3622.5 3145,3570 3170,3545 3300.03,3545 3328.19,3516.84 3328.19,3497.6 B.2@3335,3490.79 ; J1.7 3215.63,4034.68 J1.5 3281.57,3977.07 3282.37,3976.27 3282.37,3967.37 v2(3255,3940) ; B1.32 3374.49,3070.51 3295.75,3149.25 B1.42 ; v2(3733.07,3360) 3733.07,3377.72 3743.82,3388.46 3769.41,3388.46 3800,3419.06 SW1.3 ; v2(4050,3200) 4050,3138.46 4059.76,3128.7 Y1.2 ; v2(4135,2945) 4135,2898.14 4140.86,2892.28 FL.2 FL.4 ; v2(4195,3170) 4195,3163.43 4220,3138.43 C16.2 ; C12.2@4316.57,2150.79 C12.2 4323.7,2162.13 4323.7,2189.76 4398.07,2264.13 SW2.3 ; C15.2 4426.85,3100 v2(4525,3100) ; Red.2@4705.42,3397.11 Red.2 ; Blue2.2 Blue2.2@4708.95,3954.33 ; v1(4775,4150) 4777.5,4147.5 4837.5,4147.5 pad.5 ; v1(4775,4220) pad.4
  Middle Layer w10: v3(3265,3400) 3268.79,3400 3278.79,3390 3285,3390 3290,3385 v2(3290,3150)
  Bottom Layer w10: v3(3265,3400) 3265,3650 3300,3685 3445,3685 3520,3760 3520,3880 3545,3905 4115,3905 4435,4225 4670,4225 ; v1(4775,4150) 4772.5,4152.5 4742.5,4152.5 4670,4225 ; v1(4775,4220) 4722.97,4220 4717.97,4225 4670,4225
  other v2: 4127.17,3068.03
Net3.3V_2: 3.3V.2 B1.1 B1.14 B1.30 B1.33 B1.41 B1.44 B1.45 B1.55 B1.68 C4.1 C5.1 C6.2 C7.2 C8.2 C9.1 C10.1 C11.1 C12.1 C13.1 C14.1 C19.1 C20.2 L1.2 R?.1@4965,2917.83 SW2.1 | length 6383.6
  Top Layer 1 w10: 3.3V.2 2997.48,3324.72 ccw(c3004.53,3331.81) 3003.83,3321.84 v1(3030,3320) B1.1 3137.13,3290.98 3138.19,3292.05 3138.19,3293.24 3147.91,3302.95 3149.09,3302.95 3154.02,3307.87 B1.68 ; v1(3070,3085) 3070.63,3085.63 3123.86,3085.63 B1.14 ; v1(3330,3385) 3358.74,3356.26 B1.55 ; v1@3340,2955 3342.99,2957.99 B1.30 ; B1.33 3390,3009.25 3390,2960 3574.88,2775.12 L1.2 3776.57,2773.54 C8.2 ; v1(3435,3465) 3435.3,3464.77 ccw(c3441.29,3472.78) 3442.66,3462.88 3517.16,3473.4 ccw(c3515.73,3483.3) 3521.73,3475.3 ccw(c3515.73,3483.3) 3522.8,3476.23 C6.2 ; B1.41 3436.57,3132.44 3487.56,3132.44 v1(3490,3130) ; B1.44 B1.45 3479.44,3196.5 3485.94,3190 v1(3490,3190) ; C14.1 C13.1 C19.1 3674.93,2610 C8.2 ; C11.1 3776.57,2296.57 C10.1 C8.2 ; v2(4470,2510) 4470,2340 SW2.1 4465,2317.28 4475.75,2306.54 4503.58,2306.54 4533.54,2276.57 C9.1 ; C5.1 C12.1 4513.43,2210 C9.1 ; R?.1@4965,2917.83 5005,2877.83 5005,2500 4985.24,2480.24 ; C20.2 4985.24,2480.24 ; C9.1 4613.15,2276.57 C4.1 4813.39,2360 C7.2 4985.24,2480.24
  Middle Layer w10: v1(3030,3320) 3030,3129.14 ccw(c3040,3129.14) 3032.93,3122.07 v1(3070,3085) 3070,2995 3115,2950 v1(3335,2950) v1(3390,2950) 3487.45,3047.45 ccw(c3480.38,3054.52) 3490.38,3054.57 v1(3490,3130) v1(3490,3190) 3490,3250 3357.5,3382.5 3332.5,3382.5 v1(3330,3385) 3330,3417.76 3365.18,3452.94 v1(3435,3465) ; C11.1 3923.15,2150 4245,2150 4427.35,2332.35 4452.35,2332.35 4470,2350 v2(4470,2510)
Net5V_2: 5V.2 R2.2 R3.2 R4.2 | length 555.1
  Top Layer 1 w10: R2.2 2712.5,2447.5 2712.5,2577.5 R3.2 2714.23,2580.77 2714.23,2734.23 R4.2 2713.46,2737.83 2895,2919.37 5V.2
NetB1_3: B1.3 C2.2 Y2.1 | length 505.6
  Top Layer 1 w10: C2.2 2662.95,3341.54 2689.13,3341.54 2737.47,3293.19 2747.32,3293.19 2781.02,3259.49 B1.3
NetB1_4: B1.4 C3.2 Y2.2 | length 499.8
  Top Layer 1 w10: C3.2 2706.61,3219.45 2727.71,3219.45 Y2.2 2752,3243.74 B1.4
NetB1_5: B1.5 R1.1 SW2.2 | length 2371.1
  Top Layer 1 w10: v2(2810,3205) 3085.79,3205 ccw(c3085.79,3215) 3095.79,3215 3095.79,3216.18 cw(c3105.79,3216.18) 3104.91,3226.14 B1.5@3124.45,3227.99 ; R1.1 4285.87,2272.01 4331.14,2317.28 SW2.2
  Middle Layer w10: v2(2810,3205) 2850.32,3035.86 ccw(c2877.28,3042.28) 2857.84,3022.53 2926.87,2954.58 cw(c2895,2922.2) 2939.97,2928.64 2948.59,2868.48 ccw(c2958.49,2869.9) 2951.38,2862.86 3246.12,2568.13 3346.45,2568.13 3559.69,2354.88 3964.62,2354.88 4047.49,2272.01 R1.1
NetB1_8: B1.8 C1.1 D1.2 | length 1733.3
  Top Layer 1 w10: v1(3070,3175) 3074.06,3175 3079.81,3180.75 B1.8 ; v2(3565,3800) 3930,3800 4008.43,3721.57 C1.1 4008.15,3614.72 D1.2
  Middle Layer w10: v1(3070,3175) 3070,3320 3330,3580 3345,3580 v2(3565,3800)
NetB1_11: B1.11 R2.1 R5.2 | length 1010
  Top Layer 1 w10: B1.11 3123.43,3132.44 3051.58,3132.44 ccw(c3051.58,3122.44) 3045.58,3130.44 ccw(c3051.58,3122.44) 3044.53,3129.53 2987.91,3072.91 ccw(c2995,3065.86) 2987,3071.86 ccw(c2995,3065.86) 2985,3065.86 2985,2574.14 ccw(c2995,2574.14) 2987.93,2567.07 3100,2455 3133.07,2455 R2.1 3141.54,2443.46 R5.2
NetB1_15: B1.15 R3.1 R6.2 | length 1030.2
  Top Layer 1 w10: B1.15 3111.85,3070.51 3110.79,3069.45 3096.93,3069.45 3060,3032.52 3060,2650 3075,2635 3075,2630 3115,2590 3138.07,2590 R3.1 3148.07,2507.29 3190,2465.36 3190,2218.46 R6.2
NetB1_16: B1.16 R4.1 R7.2 | length 517.9
  Top Layer 1 w10: B1.16 3123.43,3053.7 3102.39,3053.7 3089.38,3040.69 3089.38,2845.62 3125,2810 3125,2756.54 R4.1 3245.47,2833.94 R7.2
NetB1_23: B1.23 pad.11 | length 2928.1
  Top Layer 1 w8: B1.23 3232.76,2932.24 3270,2895 3310,2895 3370,2835 v3(3370,2725)
  Top Layer 1 w10: v1(5170,3755) pad.11
  Middle Layer w10: v3(3370,2725) 3500,2725 3625,2850 4625,2850 4895,3120 4895,3285 4910,3300 4910,3565 5040,3695 5110,3695 v1(5170,3755)
NetB1_24: B1.24 pad.10 | length 2726.7
  Top Layer 1 w8: B1.24 3248.5,2946.5 3280,2915 3315,2915 3405,2825 3405,2765 3410,2760 v3(3435,2760)
  Top Layer 1 w10: v1(5045,3760) 5045,3762.5 5100,3817.5 pad.10
  Middle Layer w10: v3(3435,2760) 3479.39,2760 3599.39,2880 4100.15,2880 4103.77,2876.38 4596.38,2876.38 4865,3145 4865,3298.79 4885,3318.79 4885,3600 v1(5045,3760)
NetB1_31: B1.31 C15.1 L2.1 | length 1445.7
  Top Layer 1 w10: B1.31 3359.37,3008.86 3359.37,2910.63 v1(3360,2910) ; L2.1 C15.1 4417.05,3040 4405.31,3028.27 4405.31,2970.31 v2(4400,2965)
  Middle Layer w10: v1(3360,2910) 3455.86,2814.14 3464.14,2814.14 3655,3005 4360,3005 v2(4400,2965)
NetB1_34: B1.34 Y1.3 | length 695.4
  Top Layer 1 w10: B1.34 ccw(c3415.96,3010.23) 3408.84,3003.21 3409.13,3002.91 ccw(c3416.19,3010) 3416.19,3000 3905.86,3000 ccw(c3905.86,3010) 3911.86,3002 ccw(c3905.86,3010) 3912.93,3002.93 3997.36,3087.36 Y1.3
NetB1_35: B1.35 Y1.1 | length 885.5
  Top Layer 1 w10: B1.35 3508.09,3035.05 ccw(c3510,3070) 3510.35,3035 3909.97,3039.02 ccw(c3909.87,3049.02) 3916.94,3041.94 3942.07,3067.07 ccw(c3935,3074.14) 3943,3068.14 ccw(c3935,3074.14) 3945,3074.14 3945,3150.86 cw(c3955,3150.86) 3947.91,3157.91 4012.09,3222.09 cw(c4019.14,3215) 4013.14,3223 4025.14,3235 4064.5,3235 4113.74,3185.76 Y1.1
NetB1_38: B1.38 R13.1 | length 821.7
  Top Layer 1 w10: B1.38 3499.68,3086.26 3515.94,3070 v1(3520,3070)
  Middle Layer w10: v1(3520,3070) 3805.88,3070.02 ccw(c3805.88,3080.02) 3812.93,3072.93 4083.68,3343.68 R13.1
NetB1_39: B1.39 R12.1 | length 959.6
  Top Layer 1 w10: B1.39 3483.68,3101.26 ccw(c3483.83,3111.26) 3483.83,3101.26 3519.57,3101.26 ccw(c3519.57,3111.26) 3520.15,3101.28 v1(3580,3105)
  Middle Layer w10: v1(3580,3105) 3743.63,3102.87 ccw(c3743.72,3112.87) 3750.79,3105.79 3895,3250 3895,3422.65 R12.1
NetB1_43: B1.43 L1.1 | length 340.7
  Top Layer 1 w10: B1.43 3454.22,3163.23 ccw(c3455.15,3173.19) 3455.15,3163.19 3516.14,3163.19 ccw(c3516.13,3173.19) 3517.11,3163.24 3635.98,3174.95 cw(c3636.97,3165) 3636.97,3175 3673.7,3175 L1.1
NetB1_47: B1.47 pad.9 | length 2210.8
  Top Layer 1 w8: B1.47 3502.99,3227.99 3512.66,3237.66 3519.28,3237.66 3620.63,3228.2 ccw(c3625,3275) 3628.65,3228.14 3664.97,3230.97 4019.34,3249 4263.37,3250 4270,3250 4272.34,3247.66 v3(4290,3230)
  Top Layer 1 w10: v1(5040,3895) 5060,3915 pad.9
  Middle Layer w10: v3(4290,3230) 4775,3230 4855,3310 4855,3625 5040,3810 v1(5040,3895)
NetB1_48: B1.48 pad.8 | length 2256.6
  Top Layer 1 w8: B1.48 3498.74,3243.74 3507.66,3252.66 3509.62,3253 3527.01,3253 3620.78,3241.26 ccw(c3625,3275) 3627.67,3241.11 3659.32,3243.7 4014.96,3263 4265.38,3267 v3(4310,3270)
  Top Layer 1 w10: v1(5040,3990) 5042.87,3992.87 5107.87,3992.87 pad.8
  Middle Layer w10: v3(4310,3270) 4780,3270 4820,3310 4820,3640 5000,3820 5000,3950 v1(5040,3990)
NetB1_49: B1.49 pad.7 | length 2338.6
  Top Layer 1 w8: B1.49 3494.49,3259.49 3502.66,3267.66 3505,3270 3548.7,3279 3611.49,3306.2 cw(c3625,3275) 3626.57,3308.96 4253.37,3280 4260,3280 4262.34,3282.34 v3(4280,3300)
  Top Layer 1 w10: v1(5040,4100) 5042.5,4102.5 5107.5,4102.5 pad.7
  Middle Layer w10: v3(4280,3300) 4770,3300 4795,3325 4795,3685 4965,3855 4965,4025 v1(5040,4100)
NetB1_51: B1.51 pad.6 | length 2247.3
  Top Layer 1 w8: B1.51 3529.02,3290.98 3538.03,3300 v3(3540,3300)
  Top Layer 1 w10: v1(5040,4200) pad.6
  Middle Layer w10: v3(3540,3300) 3540,3385 3745,3590 3745,3675 3780,3710 4445,3710 4565,3830 4835,3830 4925,3920 4925,4085 v1(5040,4200)
NetB1_52: B1.52 B.1 | length 566
  Top Layer 1 w10: B.1@3297.6,3490.79 3298.8,3489.59 3298.8,3431.2 v1(3300,3430) ; B1.52 3405.98,3333.15 3425.33,3352.5 3447.5,3352.5 v1(3470,3375)
  Middle Layer w10: v1(3300,3430) 3300.02,3490.89 cw(c3310.02,3490.88) 3302.93,3497.93 3332.09,3527.09 cw(c3339.14,3520) 3333.14,3528 cw(c3339.14,3520) 3339.14,3530 3460.86,3530 cw(c3460.86,3520) 3466.86,3528 cw(c3460.86,3520) 3467.91,3527.09 3479.59,3515.41 cw(c3472.5,3508.36) 3480.5,3514.36 cw(c3472.5,3508.36) 3482.5,3508.36 3482.5,3416.29 3470,3403.79 v1(3470,3375)
NetB1_53: B1.53 B.3 | length 213
  Top Layer 1 w10: v1(3365,3420) 3365,3424.06 3373.7,3432.76 3373.7,3489.49 B.3@3372.4,3490.79 ; B1.53 3390.24,3339.88 cw(c3400.24,3339.88) 3392.24,3345.88 cw(c3400.24,3339.88) 3393.17,3346.95 3420,3373.79 v1(3420,3375)
  Middle Layer w10: v1(3365,3420) 3387.1,3407.9 v1(3420,3375)
NetB1_54: B1.54
NetB1_56: B1.56
NetB1_63: B1.63 R10.1 R11.1 | length 586.4
  Top Layer 1 w8: B1.63 3234,3424.59 ccw(c3200,3425) 3233.9,3427.65 3232.76,3442.24
  Top Layer 1 w10: R11.1 2989.47,3706.21 R10.1 ; R10.1@3009.43,3701.97 3009.43,3669.71 ccw(c3019.43,3669.71) 3012.35,3662.65 3232.76,3442.24
NetB1_65: B1.65 R8.1 | length 1166.1
  Top Layer 1 w10: v1(3200,3385) B1.65
  Middle Layer w10: v1(3200,3385) 3312.65,3541.44 3336.21,3565 3559.88,3565 ccw(c3559.88,3575) 3565.88,3567 ccw(c3559.88,3575) 3566.95,3567.93 3839.03,3840 3960,3840 3995.11,3804.89 R8.1
NetB1_66: B1.66 pad.2 | length 1118.8
  Top Layer 1 w8: v1(3130,3470) 3145,3455 3145,3405 3185.51,3364.49 B1.66
  Top Layer 1 w10: v3(2650,3940) pad.2
  Middle Layer w10: v3(2650,3940) 2650,3660 2795,3515 3115,3515 3130,3500 v1(3130,3470)
NetB1_67: B1.67 pad.3 | length 1153.2
  Top Layer 1 w8: v1(3105,3425) 3169.76,3360.24 B1.67
  Top Layer 1 w10: v3(2555,3945) pad.3
  Middle Layer w10: v3(2555,3945) 2555,3680 2760,3475 3074.14,3475 3080,3469.14 3080,3450 v1(3105,3425)
NetB_4: B.4 J1.3 | length 527
  Top Layer 1 w10: v3(3330,3920) 3331.38,3921.38 3331.38,4033.31 J1.3 ; B.4@3372.4,3589.21 3375,3591.81 3375,3665 3410,3700 v3(3410,3839.14)
  Middle Layer w10: v3(3330,3920) 3330,3865 3355.86,3839.14 v3(3410,3839.14)
NetB_5: B.5 J1.1 R10.2 | length 990.7
  Top Layer 1 w10: R10.2 3068.7,4056.3 v2(3105,4020) ; B.5@3335,3589.21 3335,3665.08 cw(c3345,3665.08) 3337.87,3672.1 v1(3385,3720) 3385,3785.85 3383.52,3807.43 3383.52,4034.26 J1.1
  Middle Layer w10: v2(3105,4020) 3382.13,3742.87 3382.13,3722.87 v1(3385,3720)
NetB_6: B.6 J1.2 | length 470.6
  Top Layer 1 w10: B.6@3297.6,3589.21 3300,3591.61 3300,3700 3357.93,3757.93 3357.93,4034.26 J1.2
NetBlue1_1: Blue1.1 R?.2@4965,3272.17 | length 282
  Top Layer 1 w10: R?.2@4965,3272.17 4965,3540 Blue1.1
NetBlue2_1: Blue2.1 R8.2 | length 231.9
  Top Layer 1 w10: R8.2 4446.26,3813.15 4467.77,3813.15 Blue2.1
NetC16_1: C16.1 FL.1 L2.2 | length 251.8
  Top Layer 1 w10: FL.1 4245,2910 4220,2935 C16.1 4294.17,3041.85 4295.31,3040.71 L2.2
NetC17_1: C17.1 L3.2 | length 158.5
  Top Layer 1 w8: C17.1 4550,2670 4595,2625 L3.2
NetC17_2: C17.2 FL.3 | length 205
  Top Layer 1 w10: FL.3 C17.2
NetC18_1: C18.1 L3.1 | length 180.9
  Top Layer 1 w8: L3.1 4770,2625 4786.69,2641.69 4786.69,2665.98 4785,2667.66 C18.1
NetD1_1: D1.1 SW1.2 | length 88.1
  Top Layer 1 w10: SW1.2 D1.1
NetGreen_1: Green.1 R12.2 | length 203.4
  Top Layer 1 w10: R12.2 4517.89,3691.21 Green.1
NetJ1_4: J1.4 R?.1@3177.83,3695 | length 446
  Top Layer 1 w10: R?.1@3177.83,3695 3190,3707.17 3190,3740 3200,3750 3290,3750 3306.74,3766.74 3306.74,4034.26 J1.4
NetR13_2: R13.2 Red.1 | length 167.8
  Top Layer 1 w10: R13.2 Red.1
pads on no net: B1.2 B1.6 B1.7 B1.9 B1.10 B1.12 B1.13 B1.17 B1.18 B1.19 B1.20 B1.21 B1.22 B1.25 B1.26 B1.27 B1.28 B1.29 B1.36 B1.37 B1.40 B1.46 B1.50 B1.57 B1.58 B1.59 B1.60 B1.61 B1.62 B1.64

## Polygon pours and split planes (outlines as drawn)
GND on Ground Layer "GND_L04_P001" (solid, pour order 1): 2435,4205 2440,4210 5240,4210 5240,2055 5200,2095 2430,2095

## Silkscreen, mask and mechanical layers (free items; w line width, h text height)
Top Overlay:
  text "GND" at 4900,4205 h30
  text "W+" at 5175,4185 h30
  text "GND" at 4895,4130 h30
  text "UART-TX" at 2725,4110 h30 r270
  text "W-" at 5170,4090 h30
  text "ECEN404 Team 26: RPM1" at 3635,4005 h50
  text "V-" at 5170,3990 h30
  text "UART-RX" at 2495,3910 h30 r90
  text "U-" at 5170,3900 h30
  text "V+" at 5110,3715 h30 r90
  text "U+" at 5250,3715 h30 r90
Mechanical 1:
  lines w10: 2405,2090 2405,4155 2405,4205.5 cw(c2464.14,4205.5) 2422.32,4247.32 cw(c2465,4204.64) 2465,4265 5251.36,4265 cw(c5251.36,4232.07) 5274.64,4255.36 cw(c5189.29,4170) 5310,4170 5310,2106.92 cw(c5208.79,2106.92) 5280.36,2035.36 cw(c5195,2120.71) 5195,2000 2475.71,2000 cw(c2475.71,2050) 2440.36,2014.64 cw(c2525.71,2100) 2405,2100